# EAGLE board tinkercadfile (EAGLE 9.7.0)

Size 195.98 x 82.4 mm. Coordinates in mm from the lower left corner, seen from the top.
Outline: 0,0 195.98,0 195.98,82.4 0,82.4 0,0
Copper layers (1*16): Top 0.035mm / dielectric 1.5mm / Bottom 0.035mm
Design rules "default": minimum track width 6mil, minimum drill 0.35mm, track to track 6mil, track to pad 6mil, pad to pad 6mil, via to via 6mil, smd to smd 6mil, copper to edge 40mil, drill to drill 6mil, minimum pad ring 10mil, minimum via ring 8mil, stop-mask expansion 4mil, vias tented up to drill 0mil, thermal gap 10mil

## Footprints (pad centres in the part's own frame; a part is rotated, then mirrored left to right if it is on the bottom)
LEDRD254W60D565H860B = drill 0.981 pad 1.581: 1 -1.27,0; 2 1.27,0
RESAD1016W63L850D250B = drill 0.83 pad 1.43: 1 -5.08,0; 2 5.08,0
HA-06-SM065 = drill 1 pad 1.676: 1 -2.54,-2.54; 2 0,2.54; 3 2.54,-2.54
ARDUINO-UNO-R3-SHIELD = drill 1.016 pad 1.88: 3.3V 24.13,-2.54; 5V 24.13,0; A0 24.13,12.7; A1 24.13,15.24; A2 24.13,17.78; A3 24.13,20.32; A4 24.13,22.86; A5 24.13,25.4; AREF -24.13,-13.97; D2 -24.13,20.32; D3 -24.13,17.78; D4 -24.13,15.24; D5 -24.13,12.7; D6 -24.13,10.16; D7 -24.13,7.62; D8 -24.13,3.81; D9 -24.13,1.27; D10 -24.13,-1.27; D11 -24.13,-3.81; D12 -24.13,-6.35; D13 -24.13,-8.89; GND@0 24.13,2.54; GND@1 24.13,5.08; GND@2 -24.13,-11.43; IOREF 24.13,-7.62; NC 24.13,-10.16; RES 24.13,-5.08; RX -24.13,25.4; SCL -24.13,-19.05; SDA -24.13,-16.51; TX -24.13,22.86; VIN 24.13,7.62

## Placement (x,y rotation side)
D2  RED  [LEDRD254W60D565H860B]  99.73,35.89 180 top
D3  RED  [LEDRD254W60D565H860B]  107.35,35.89 180 top
D4  RED  [LEDRD254W60D565H860B]  122.59,35.89 180 top
D6  RED  [LEDRD254W60D565H860B]  114.97,35.89 180 top
D7  RED  [LEDRD254W60D565H860B]  130.21,35.89 180 top
D8  RED  [LEDRD254W60D565H860B]  137.83,35.89 180 top
D9  RED  [LEDRD254W60D565H860B]  145.45,35.89 180 top
D10  RED  [LEDRD254W60D565H860B]  153.07,35.89 180 top
D11  RED  [LEDRD254W60D565H860B]  160.69,35.89 180 top
R1  160  [RESAD1016W63L850D250B]  98.46,51.13 90 top
R2  160  [RESAD1016W63L850D250B]  106.08,51.13 90 top
R3  160  [RESAD1016W63L850D250B]  113.7,51.13 90 top
R4  160  [RESAD1016W63L850D250B]  121.32,51.13 90 top
R5  160  [RESAD1016W63L850D250B]  128.94,51.13 90 top
R6  160  [RESAD1016W63L850D250B]  136.56,51.13 90 top
R7  160  [RESAD1016W63L850D250B]  144.18,51.13 90 top
R8  160  [RESAD1016W63L850D250B]  151.8,51.13 90 top
R9  160  [RESAD1016W63L850D250B]  159.42,51.13 90 top
RPOT1  10k  [HA-06-SM065]  188.93,66.16 0 top
U1  ARDUINO-UNO-R3-SHIELD  [ARDUINO-UNO-R3-SHIELD]  29.84,34.52 180 top

## Library data of the parts
D2-D4 D6-D11 = Tinkercad; CATEGORY: Opto-Electronic; SUB-CATEGORY: LED; VALUE: LED_RED
R1-R9 RPOT1 U1 = Tinkercad

## Nets
D2_C: D2.2 R1.1
D3_C: D3.2 R2.1
D4_C: D4.2 R4.1
D6_C: D6.2 R3.1
D7_C: D7.2 R5.1
D8_C: D8.2 R6.1
D9_C: D9.2 R7.1
D10_C: D10.2 R8.1
D11_C: D11.2 R9.1
U1_5V: RPOT1.3 U1.5V
U1_A5: RPOT1.2 U1.A5
U1_D5: D11.1 U1.D5
U1_D6: D10.1 U1.D6
U1_D7: D9.1 U1.D7
U1_D8: D8.1 U1.D8
U1_D9: D7.1 U1.D9
U1_D10: D4.1 U1.D10
U1_D11: D6.1 U1.D11
U1_D12: D3.1 U1.D12
U1_D13: D2.1 U1.D13
U1_GND: R1.2 R2.2 R3.2 R4.2 R5.2 R6.2 R7.2 R8.2 R9.2 RPOT1.1 U1.GND@0 U1.GND@1 U1.GND@2

## Tracks (layer width: path | path; a pad name or v marks a point on that pad's centre or on a via)
D2_C  (1 unrouted)
D3_C  (1 unrouted)
D4_C  (1 unrouted)
D6_C  (1 unrouted)
D7_C  (1 unrouted)
D8_C  (1 unrouted)
D9_C  (1 unrouted)
D10_C  (1 unrouted)
D11_C  (1 unrouted)
U1_5V  (1 unrouted)
U1_A5  (1 unrouted)
U1_D5  (1 unrouted)
U1_D6  (1 unrouted)
U1_D7  (1 unrouted)
U1_D8  (1 unrouted)
U1_D9  (1 unrouted)
U1_D10  (1 unrouted)
U1_D11  (1 unrouted)
U1_D12  (1 unrouted)
U1_D13  (1 unrouted)
U1_GND  (12 unrouted)